# Altium PCB PCB1-esp with usb.PcbDoc
Units mil, origin at the board's own origin, x right, y up, seen from the top; angles counter-clockwise.
Board outline 6000 x 4000 mil, 2 copper layers (Top Layer, Bottom Layer); 11 components, 19 nets, 40 pads, 0 vias.
Unrouted connection lines stored in the file: 15.
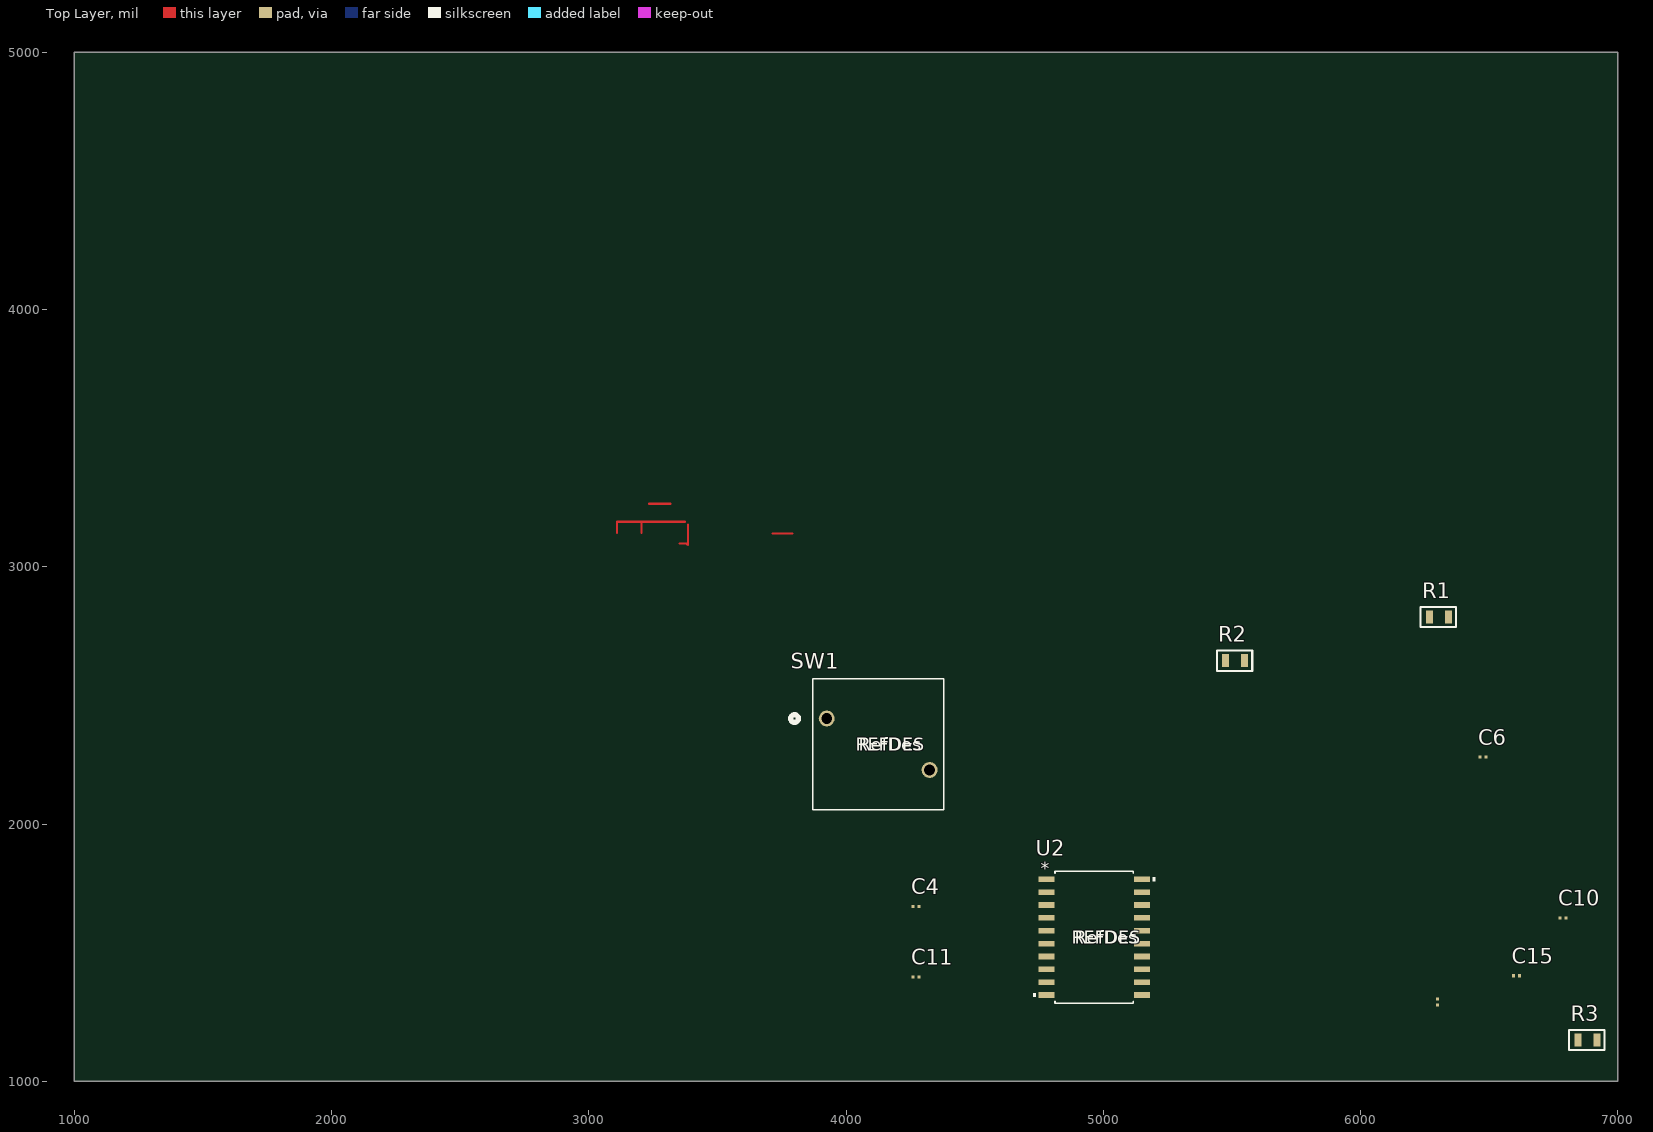
[diagram p0: Top Layer view]
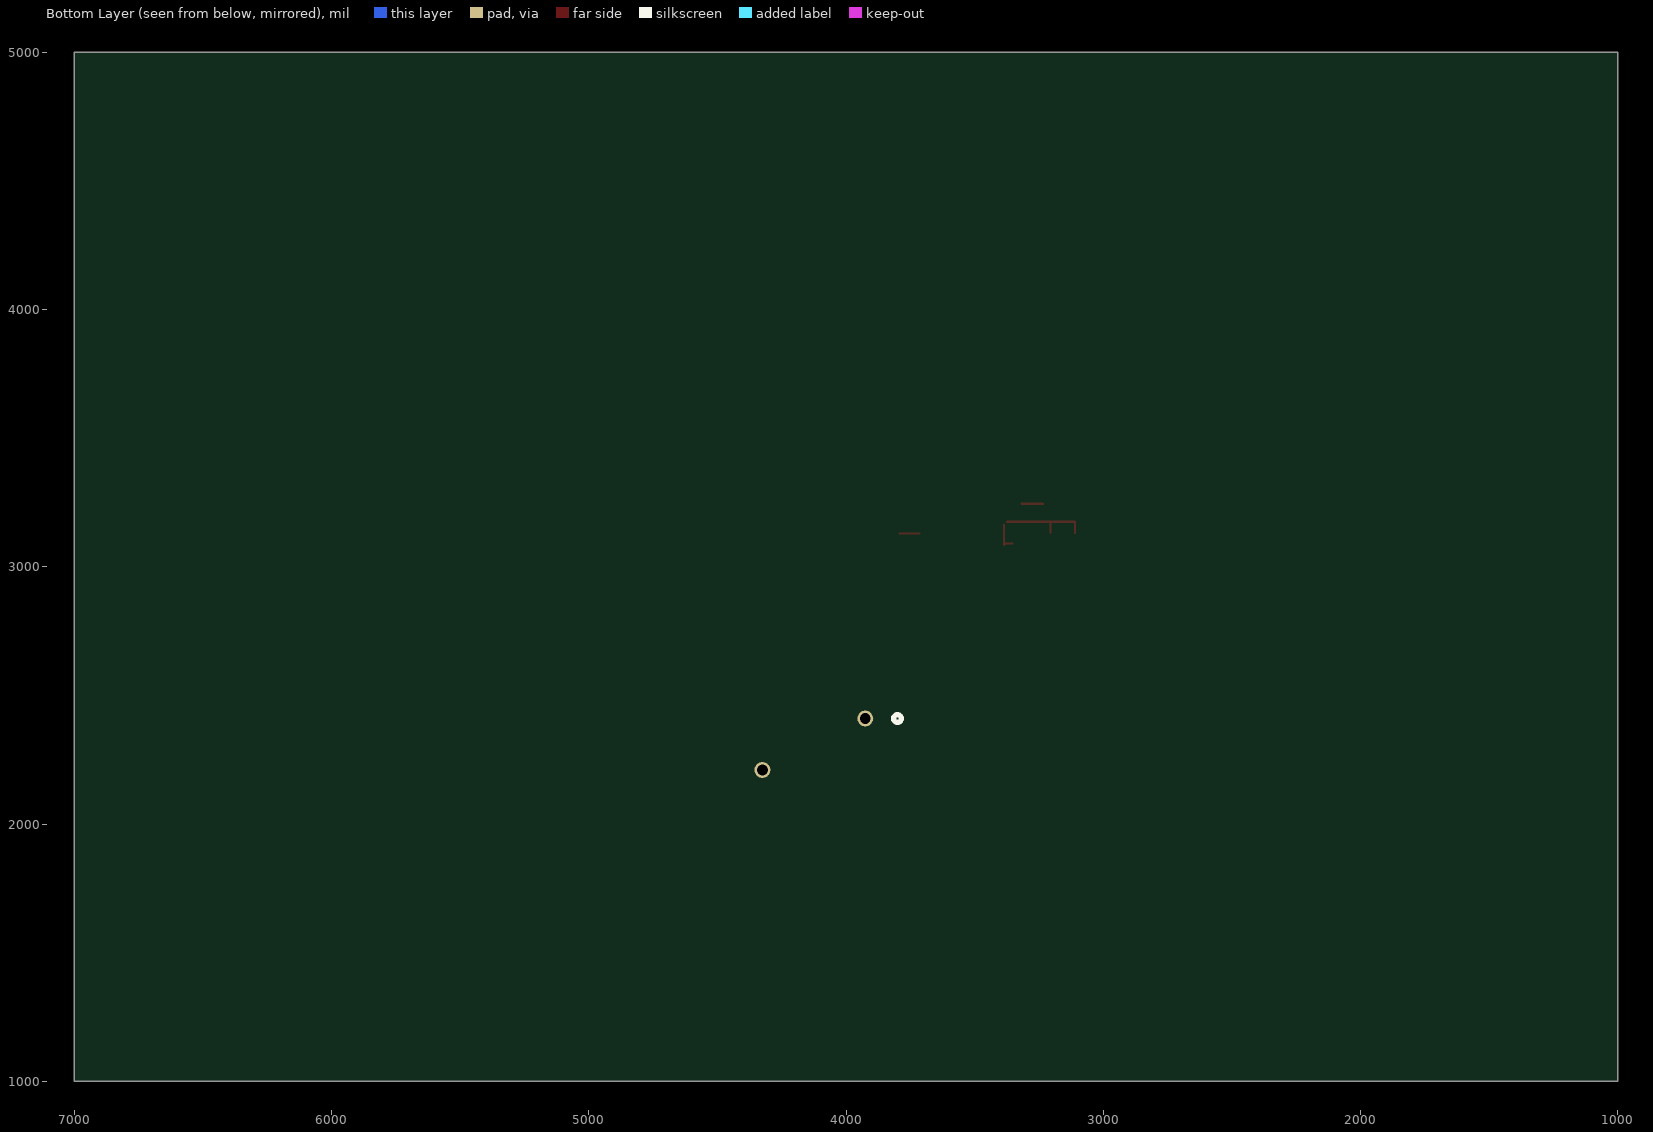
[diagram p1: Bottom Layer view, seen from below]

## Layer stack, top to bottom
Top Solder: solder mask 0.4, Solder Resist, Dk 3.5
Top Layer: signal copper 1.4
Dielectric 1: dielectric 12.6, FR-4, Dk 4.8
Bottom Layer: signal copper 1.4
Bottom Solder: solder mask 0.4, Solder Resist, Dk 3.5

## Board outline
1000,1000 7000,1000 7000,5000 1000,5000

## Design rules (kind name [scope] priority, off if disabled: settings)
Clearance [All] p1: gap=10 ignorepadtopadclearanceinfootprint=FALSE except(0: Arc-Hole Track-Hole SMDPad-Hole THPad-Hole Via-Hole Fill-Hole Poly-Hole Region-Hole Text-Hole)
PolygonConnect [All] p1: connectstyle=Relief reliefconductorwidth=10 reliefentries=4 polygonreliefangle="90 Angle" airgapwidth=10
RoomDefinition "Copy of esp with usb.~(4)" [InComponentClass('Copy of esp with usb.~(4)')] p1: confinementstyle=ConfineIn formatcopy=TRUE lockcomponents=FALSE outline 7033.19,1065 9263.19,1065 9263.19,1985 7033.19,1985
RoomDefinition "esp with usb" [InComponentClass('esp with usb')] p2: confinementstyle=ConfineIn formatcopy=TRUE lockcomponents=FALSE outline 7032.6,1060 9262.6,1060 9262.6,1980 7032.6,1980
RoutingVias [All] p1: holewidth=28 width=50 viastyle="Through Hole" minholewidth=28 minwidth=50 maxholewidth=28 maxwidth=50
SolderMaskExpansion [All] p1: expansion=4 istentingtop=FALSE
Width [All] p1: maxlimit=10 minlimit=10 preferedwidth=10
30 further rules are at their usual default settings.

## Classes and differential pairs
component class "esp with usb": C4 C6 C10 C11 JP? R1 R2 SW1 U2 XTAL?

## Components (designator, comment, footprint, x,y, rotation, side; value= is the part's Value field where it differs from the comment)
C4 "22uF" PCBComponent_1 4251.81,1605 r0 top
C6 "22uF" PCBComponent_1 6456.81,2185 r0 top
C10 "22uF" PCBComponent_1 6766.81,1560 r0 top
C11 "22uF" PCBComponent_1 4251.81,1330 r0 top
C15 "22uF" PCBComponent_1 6586.81,1335 r0 top
R1 "10K R" R0805 6305,2805 r0 top
R2 "10K R" R0805 5512.4,2635 r0 top
R3 "10K R" R0805 6882.4,1160 r0 top
SW1 "MDPSLFS" SW_MDPSLFS_CNK 3925,2410 r0 top
U2 "MCP2200T-I/SO" SOIC20_SO_MCH 4965,1560 r0 top
? "INDUCTOR" PCBComponent_1 6375,1288.19 r90 top

## Footprints (in the part's own frame and the unit in brackets; to place one, negate y for a bottom-side part, rotate by r counter-clockwise, add the part's x,y. Pads: shape width x height; smd on the part's side, far side on the other; paste and mask are expansions set on the pad)
PCBComponent_1 [mm]
  rect 0.3x0.3 smd: 1(0.208,1.905) 2(0.808,1.905)
  body extent 0.21,1.7 0.81,2.11, height 0.31
R0805 [mm]
  rect 0.7x1.3 smd: 1(-0.95,0) 2(0.95,0)
  silkscreen extent -1.8,-1 1.7,1, body extent -1,-0.63 1,0.63, height 0.61
SOIC20_SO_MCH [mil]
  rect 63.04x22 smd paste+0 mask+0: 1(-185.48,225) 2(-185.48,175) 3(-185.48,125) 4(-185.48,75) 5(-185.48,25) 6(-185.48,-25) 7(-185.48,-75) 8(-185.48,-125) 9(-185.48,-175) 10(-185.48,-225) 11(185.48,-225) 12(185.48,-175) 13(185.48,-125) 14(185.48,-75) 15(185.48,-25) 16(185.48,25) 17(185.48,75) 18(185.48,125) 19(185.48,175) 20(185.48,225)
  silkscreen extent -237,-257 237,257, body extent -203,-252 203,252, height 104
SW_MDPSLFS_CNK [mil]
  round 62 / inner round 60 / far side round 62 hole 42 paste-99999 mask+0: 1(0,0) 2(400,-200)
  silkscreen extent -140,-355 455,155

## Part data
C4 C10 C11 C15: library part CAP22UF
C6: library part CAP22pF
R1 R2 R3: library part RESSS
SW1: "Description", Manufacturer_Name="C&K Components", Copyright="Copyright (C) 2025 Ultra Librarian. All rights reserved.", Manufacturer_Part_Number=MDPSLFS, Type="Pushbutton Switches"
U2: library part MCP2200T-ISO, "No Description Available", Manufacturer_Name=Microchip, Copyright="Copyright (C) 2025 Ultra Librarian. All rights reserved.", Manufacturer_Part_Number=MCP2200T-I/SO, RefDes=RefDes, Type=Type

## Nets (pads, with @x,y where several pads share a name; then routed paths per layer and width w, separated by ;. In a path a pad name is that pad's centre, name@x,y a point inside that pad or via, vN(x,y) a via of type N, cw(c..) or ccw(c..) an arc to the next point about the centre after c; other vN are vias at no path point)
+3V3: 
GND: C4.1 C6.1 C10.1 C11.1 C15.1 SW1.1 U2.20
Net_1: ?.1
NetC4_2: C4.2 C6.2 SW1.2
NetC10_2: C10.2 U2.2
NetC11_2: C11.2 U2.3
NetC15_2: C15.2 R3.1
NetC17_2: R3.2
NetJP1_2: 
NetJP1_3: 
NetJP2_1: 
NetJP2_2: 
NetJP2_3: 
NetJP2_4: 
NetJP3_2: U2.10
NetJP3_3: U2.12
NetR1_1: R1.1
NetR2_1: R2.1 U2.4
VDD33: R1.2 R2.2 U2.1 U2.17
pads on no net: ?.2 U2.5 U2.6 U2.7 U2.8 U2.9 U2.11 U2.13 U2.14 U2.15 U2.16 U2.18 U2.19
copper on no net: | length 641
  Top Layer w7.87: 3110,3131.81 3110,3175 3205,3175 ; 3205,3131.81 3205,3175 ; 3235,3245 3318.19,3245 ; 3351.81,3090 3385,3090 3380,3090 3385,3085 ; 3375,3175 3205,3175 ; 3382.5,3087.5 3385,3085 ; 3385,3165 3385,3085 ; 3715,3130 3792.6,3130

## Text inside footprints (layer, text, board x,y; h text height)
SW1: Top Overlay "REFDES" at 4037.5,2285 h50; Top Overlay "RefDes" at 4050,2285 h50; Mechanical 13 "RefDes2" at 4037.5,2285 h50
U2: Top Overlay "REFDES" at 4877.5,1535 h50; Top Overlay "RefDes" at 4890,1535 h50; Top Overlay "*" at 4757.02,1802 h50; Mechanical 13 "RefDes2" at 4877.5,1535 h50; Mechanical 13 "*" at 4820,1759 h50